# Altium PCB 2Motor16servoV3.PcbDoc (part 1 of 3)
Units mil, origin at the board's own origin, x right, y up, seen from the top; angles counter-clockwise.
Board outline 6000 x 4000 mil, 2 copper layers (Top Layer, Bottom Layer); 79 components, 93 nets, 290 pads, 78 vias.
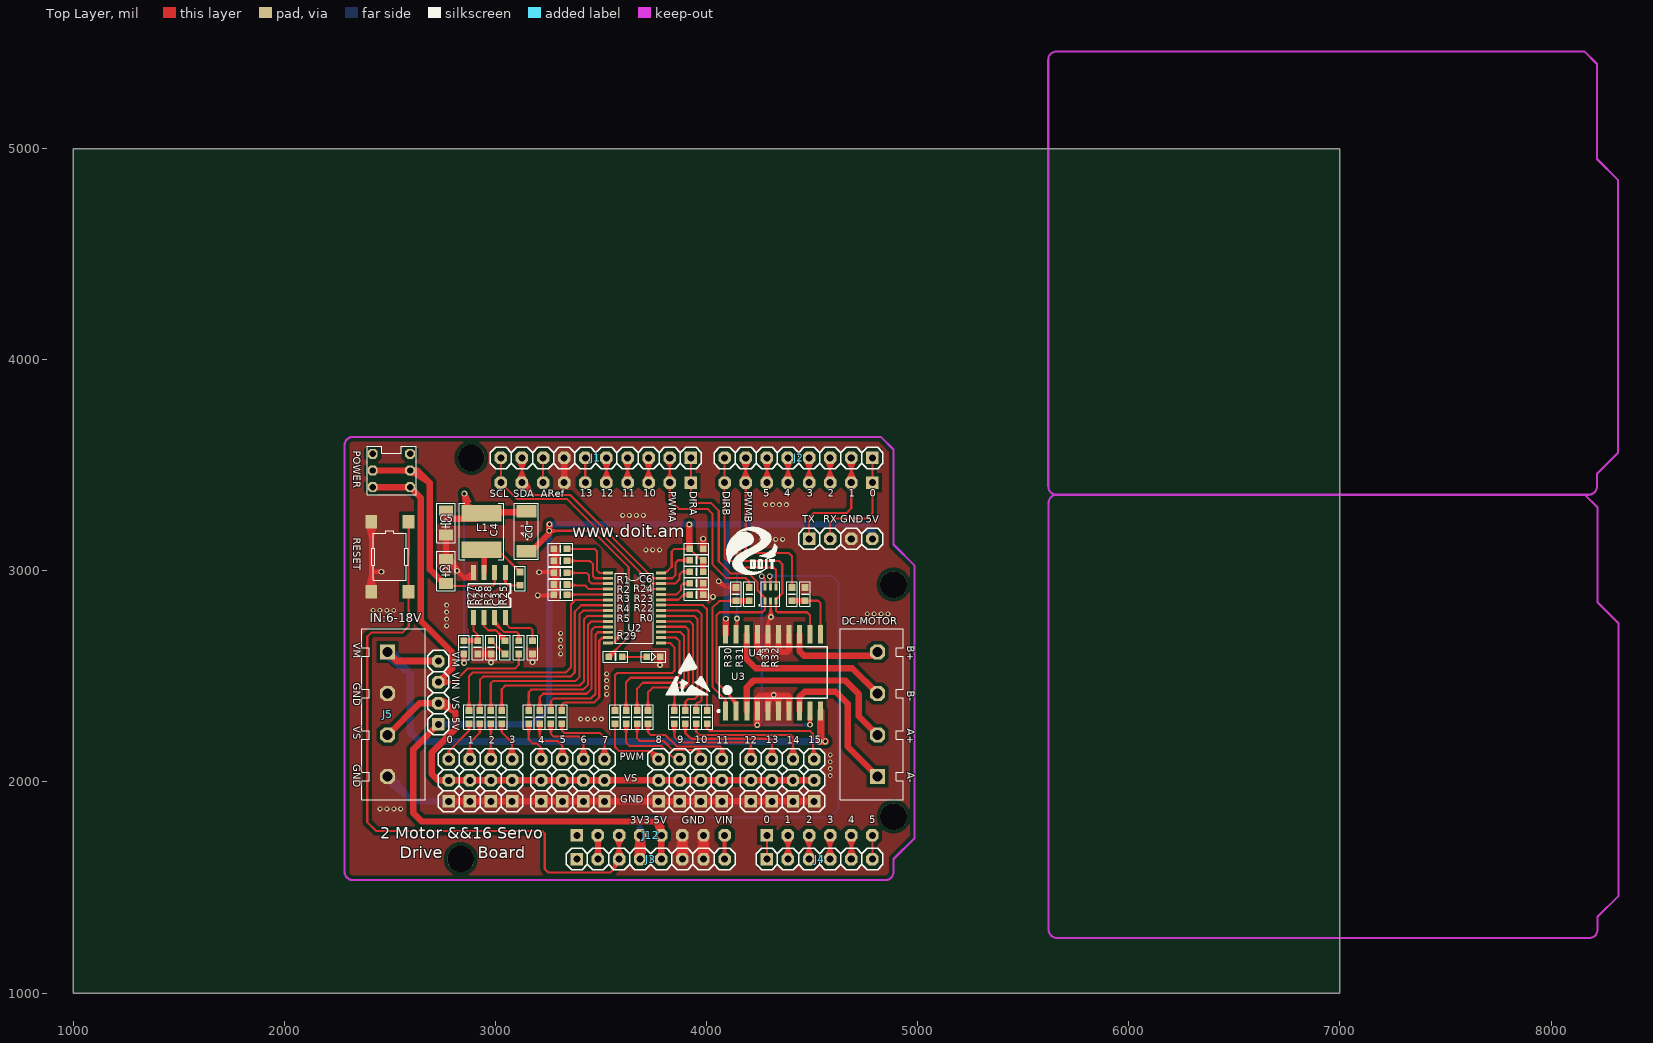
[diagram p0: Top Layer view]
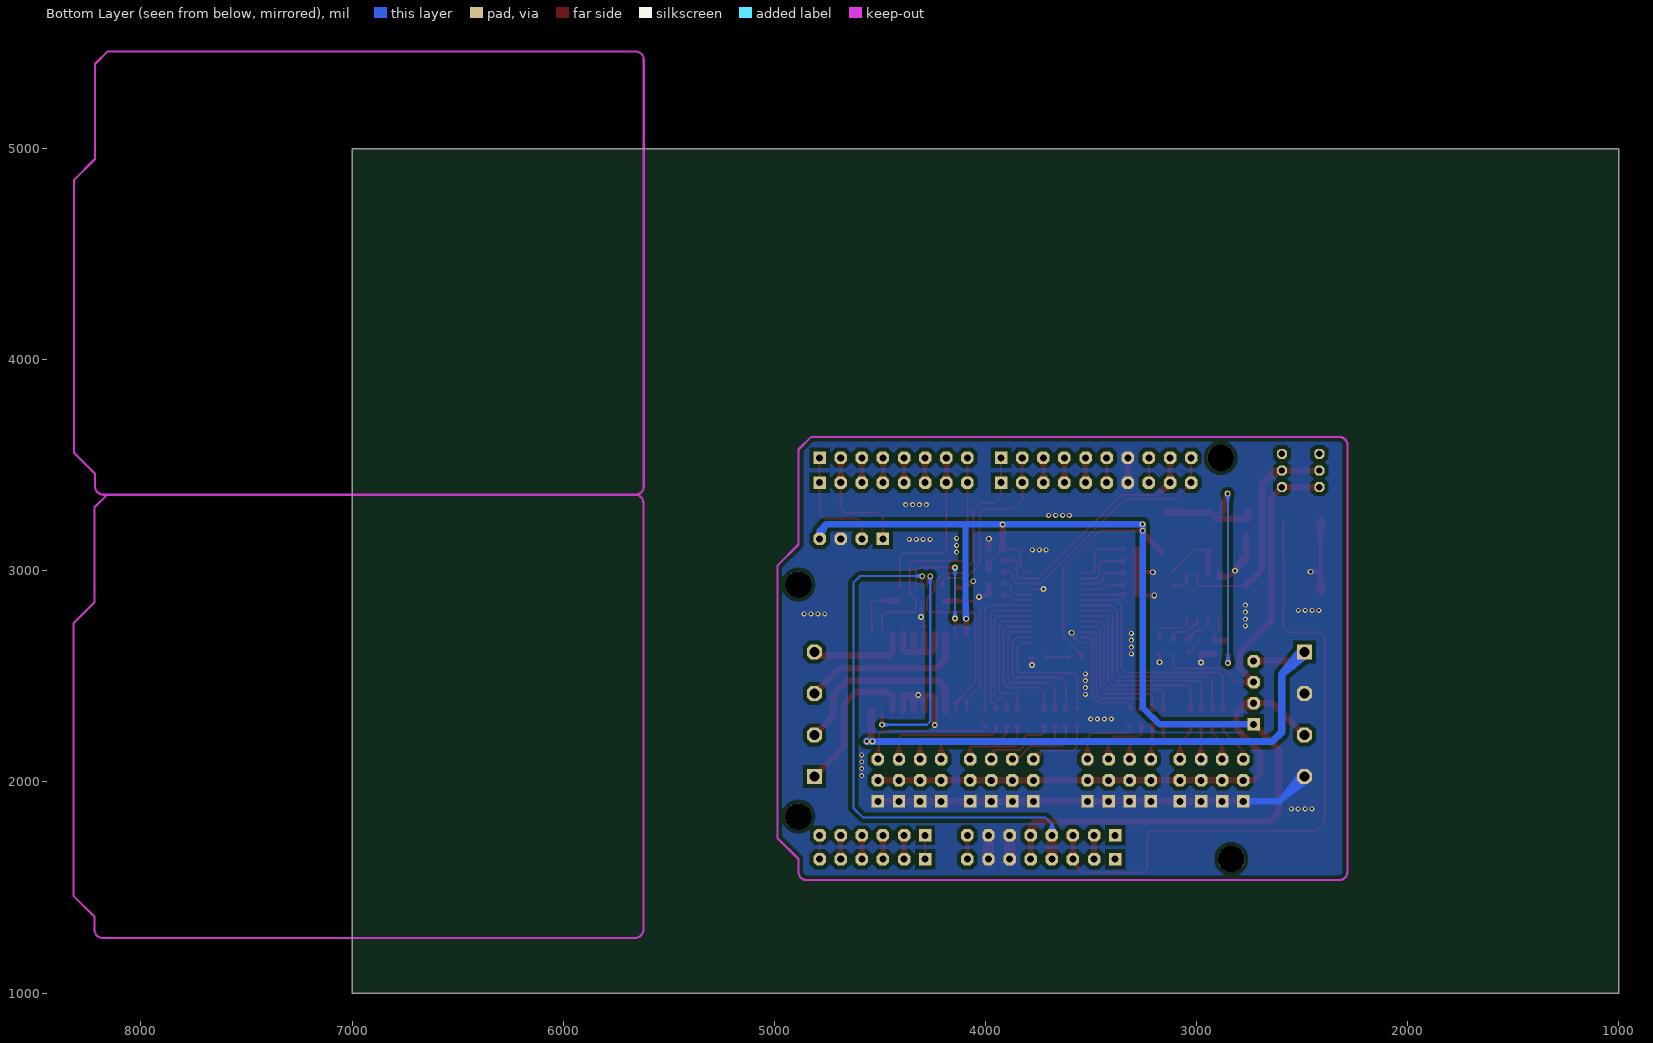
[diagram p1: Bottom Layer view, seen from below]

## Layer stack, top to bottom
Top Layer: signal copper 1.4
Dielectric: dielectric 12.6, FR-4, Dk 4.8
Bottom Layer: signal copper 1.4

## Board outline
1000,1000 7000,1000 7000,5000 1000,5000

## Design rules (kind name [scope] priority, off if disabled: settings)
Clearance Clearance_1 [InPoly] p1: gap=18
Clearance [All] p2: gap=8
ComponentClearance [All] p1 off: gap=10 collisioncheckmode=3 verticalgap=10 showdistances=FALSE
HoleSize [All] p1: absolutevalues=TRUE maxlimit=500 minlimit=1 maxpercent=80.000 minpercent=20.000
MinimumSolderMaskSliver [All] p1 off: minsoldermaskwidth=10
PolygonConnect PolygonConnect_1 [IsPoly] p1: connectstyle=Direct reliefconductorwidth=10 reliefentries=4 polygonreliefangle="90 Angle"
PolygonConnect [All] p2: connectstyle=Relief reliefconductorwidth=10 reliefentries=4 polygonreliefangle="90 Angle"
RoutingVias [All] p1: holewidth=28 width=50 viastyle="Through Hole" minholewidth=28 minwidth=50 maxholewidth=28 maxwidth=50
SilkToSilkClearance [All] p1 off: silktosilkclearance=10
SilkscreenOverComponentPads [All] p1 off: minsilkscreentomaskgap=10
SolderMaskExpansion [All] p1: expansion=4
Width [All] p1: maxlimit=40 minlimit=10 preferedwidth=10
23 further rules are at their usual default settings.

## Classes and differential pairs
component class Motor: 0 1 2 3 C1 C3 C4 C5 C6 D2 J1 J2 J3 J4 L1 POWER R1 R2 R3 R4 R5 R22 R23 R24 R25 R29 R30 R31 R32 R33 U2 U3 U4

## Components (designator, comment, footprint, x,y, rotation, side; value= is the part's Value field where it differs from the comment)
0 "SIP-1X03" DIP-1X03-2.54-MTA 2780,1908 r90 top (schematic designator PWM0)
1 "SIP-1X03" DIP-1X03-2.54-MTA 2880,1908 r90 top (schematic designator PWM1)
2 "SIP-1X03" DIP-1X03-2.54-MTA 2980,1908 r90 top (schematic designator PWM2)
3 "SIP-1X03" DIP-1X03-2.54-MTA 3080,1908 r90 top (schematic designator PWM3)
4 "SIP-1X03" DIP-1X03-2.54-MTA 3218,1908 r90 top (schematic designator PWM4)
5 "SIP-1X03" DIP-1X03-2.54-MTA 3318,1908 r90 top (schematic designator PWM5)
6 "SIP-1X03" DIP-1X03-2.54-MTA 3418,1908 r90 top (schematic designator PWM6)
7 "SIP-1X03" DIP-1X03-2.54-MTA 3518,1908 r90 top (schematic designator PWM7)
8 "SIP-1X03" DIP-1X03-2.54-MTA 3774,1908 r90 top (schematic designator PWM8)
9 "SIP-1X03" DIP-1X03-2.54-MTA 3874,1908 r90 top (schematic designator PWM9)
10 "SIP-1X03" DIP-1X03-2.54-MTA 3974,1908 r90 top (schematic designator PWM10)
11 "SIP-1X03" DIP-1X03-2.54-MTA 4074,1908 r90 top (schematic designator PWM11)
12 "SIP-1X03" DIP-1X03-2.54-MTA 4211,1908 r90 top (schematic designator PWM12)
13 "SIP-1X03" DIP-1X03-2.54-MTA 4311,1908 r90 top (schematic designator PWM13)
14 "SIP-1X03" DIP-1X03-2.54-MTA 4411,1908 r90 top (schematic designator PWM14)
15 "SIP-1X03" DIP-1X03-2.54-MTA 4511,1908 r90 top (schematic designator PWM15)
C1 "22UF" 1206C 2764,3004 r90 top
C2 "100nF" 0603C 3175,2644 r270 top
C3 "3.3nF" 0603C 3045.16,2644 r270 top
C4 "10nF" 0603C 3115.95,2969 r270 top
C5 "22UF" 1206C 2764,3232.55 r90 top
C6 "100nF" 0603C 3958,3104.18 r180 top
D2 "SS24" SMB 3146,3281.5 r270 top
J1 "DIP-1X10" DIP-1X10-2.54 3475,3535 r180 top locked (schematic designator IOH)
J2 "DIP-1X08" DIP-1X08-2.54 4435,3535 r180 top locked (schematic designator IOL)
J3 "DIP-1X08" DIP-1X08-2.54 3735,1635 r0 top locked (schematic designator POWER)
J4 "DIP-1X06" DIP-1X06-2.54 4535,1635 r0 top locked (schematic designator AD)
J5 "DIP-1X04" DIP-1X04-5.00-MTA 2489,2616 r270 top
J6 "DIP-1X04" DIP-1X04-2.54 2729,2523 r90 top
J7 "DIP-1X04" DIP-1X04-5.00-MTA 4810,2025.45 r90 top
J8 "DIP-1X04" DIP-1X04-2.54 4735,3152 r0 top
J10 "DIP-1X10" "DIP-1X10-2.54 - duplicate" 3475,3418 r180 top
J11 "DIP-1X08" "DIP-1X08-2.54 - duplicate" 4435,3418 r180 top
J12 "DIP-1X08" "DIP-1X08-2.54 - duplicate" 3735,1747 r0 top
J13 "DIP-1X06" "DIP-1X06-2.54 - duplicate" 4535,1747 r0 top
L1 "L" L5*5 2948,3187 r270 top
POWER "SW" BT-2 2418,3397 r0 top
R0 "10K" 0603R 3946,2888 r0 top (schematic designator R22)
R1 "10K" 0603R 3313,3103.59 r180 top
R2 "10K" 0603R 3313,3047.19 r180 top
R3 "10K" 0603R 3313,2990.79 r180 top
R4 "10K" 0603R 3313,2934.4 r180 top
R5 "10K" 0603R 3313,2886 r180 top
R6 "220R" 0603R 2875,2313 r270 top
R7 "220R" 0603R 2926.67,2313 r270 top
R8 "220R" 0603R 2978.33,2313 r270 top
R9 "220R" 0603R 3030,2313 r270 top
R10 "220R" 0603R 3158,2313 r270 top
R11 "220R" 0603R 3210.33,2313 r270 top
R12 "220R" 0603R 3262.67,2313 r270 top
R13 "220R" 0603R 3315,2313 r270 top
R14 "220R" 0603R 3567,2313 r270 top
R15 "220R" 0603R 3619.67,2313 r270 top
R16 "220R" 0603R 3671.33,2313 r270 top
R17 "220R" 0603R 3723,2313 r270 top
R18 "220R" 0603R 3848,2313 r270 top
R19 "220R" 0603R 3899.67,2313 r270 top
R20 "220R" 0603R 3951.33,2313 r270 top
R21 "220R" 0603R 4003,2313 r270 top
R22 "10K" 0603R 3946,2942.4 r0 top
R23 "10K" 0603R 3946,2996.8 r0 top
R24 "10K" 0603R 3946,3051.19 r0 top
R25 "100K" 0603R 3110.67,2644 r270 top
R26 "10K 1%" 0603R 2913.92,2632 r90 top
R27 "44.2K-48K" 0603R 2849,2632 r90 top
R28 "2.2K" 0603R 2978.84,2632 r90 top
R29 "2K" 0603R 3574,2592 r180 top
R30 "100K" 0603R 4138,2884 r90 top
R31 "1K" 0603R 4202,2896 r270 top
R32 "100K" 0603R 4467,2896 r270 top
R33 "1K" 0603R 4403,2884 r90 top
RED "YELLOW" 0603LED 3742,2593.41 r0 top
RESET "KEY_USER" TS42-5PIN 2499,3067 r270 top (schematic designator S1)
U1 "MP1482" SOP8-MP1482 3046,2993 r270 top
U2 "PCA9685" TSOP28 3532,2658 r0 top
U3 "L293D" SO20-L293D 4315,2518 r90 top
U4 "74LVC2G04" SOP6 4302,2890.98 r90 top
? "Comment" ESD 3924,2492 r0 top
? "Comment" LOGO-6*6 4216,3096 r0 top

## Footprints (in the part's own frame and the unit in brackets; to place one, negate y for a bottom-side part, rotate by r counter-clockwise, add the part's x,y. Pads: shape width x height; smd on the part's side, far side on the other; paste and mask are expansions set on the pad)
0603C [mm]
  rect 0.8x0.8 smd: 1(-0.65,-0.01) 2(0.95,-0.01)
  silkscreen extent -1.32,-0.66 1.63,0.64
0603LED [mm]
  rect 0.8x0.8 smd: 1(-0.65,-0.01) 2(0.95,-0.01)
  silkscreen extent -1.32,-0.66 1.63,0.64
0603R [mm]
  rect 0.8x0.8 smd: 1(-0.65,-0.025) 2(0.95,-0.025)
  silkscreen extent -1.32,-0.68 1.63,0.62
1206C [mm]
  rect 1.3x1.7 smd: 1(-1.6,-0.025) 2(1.299,-0.025)
  silkscreen extent -2.51,-1.12 2.24,1.09
BT-2 [mm]
  oct 1.2x1.2 hole 0.762: 1(0,0) 1(4.5,0) 2(0,2) 2(4.5,2) 3(0,4) 3(4.5,4)
  silkscreen extent -0.65,-0.9 5.25,4.9
DIP-1X03-2.54-MTA [mm]
  rect 1.5x1.5 hole 0.85: 1(0,0.051)
  oct 1.5x1.5 hole 0.85: 2(2.54,0.051) 3(5.08,0.051)
  silkscreen extent -1.27,-1.22 6.35,1.32
DIP-1X04-2.54 [mm]
  rect 1.5x1.5 hole 0.85: 1(-6.35,0)
  oct 1.5x1.5 hole 0.85: 2(-3.81,0) 3(-1.27,0) 4(1.27,0)
  silkscreen extent -7.62,-1.27 2.54,1.27
DIP-1X04-5.00-MTA [mm]
  rect 1.8x1.8 hole 1.2: 1(0,0)
  oct 1.8x1.8 hole 1.2: 2(5,0) 3(10,0) 4(15,0)
  silkscreen extent -2.79,-3.1 17.79,4.5
DIP-1X06-2.54 [mm]
  rect 1.5x1.5 hole 0.85: 1(-6.35,0)
  oct 1.5x1.5 hole 0.85: 2(-3.81,0) 3(-1.27,0) 4(1.27,0) 5(3.81,0) 6(6.35,0)
  silkscreen extent -7.62,-1.27 7.62,1.27
"DIP-1X06-2.54 - duplicate" [mm]
  rect 1.5x1.5 hole 0.85: 1(-6.35,0)
  oct 1.5x1.5 hole 0.85: 2(-3.81,0) 3(-1.27,0) 4(1.27,0) 5(3.81,0) 6(6.35,0)
DIP-1X08-2.54 [mm]
  rect 1.5x1.5 hole 0.85: 1(-8.89,0)
  oct 1.5x1.5 hole 0.85: 2(-6.35,0) 3(-3.81,0) 4(-1.27,0) 5(1.27,0) 6(3.81,0) 7(6.35,0) 8(8.89,0)
  silkscreen extent -10.16,-1.27 10.16,1.27
"DIP-1X08-2.54 - duplicate" [mm]
  rect 1.5x1.5 hole 0.85: 1(-8.89,0)
  oct 1.5x1.5 hole 0.85: 2(-6.35,0) 3(-3.81,0) 4(-1.27,0) 5(1.27,0) 6(3.81,0) 7(6.35,0) 8(8.89,0)
DIP-1X10-2.54 [mm]
  rect 1.5x1.5 hole 0.85: 1(-11.43,0)
  oct 1.5x1.5 hole 0.85: 2(-8.89,0) 3(-6.35,0) 4(-3.81,0) 5(-1.27,0) 6(1.27,0) 7(3.81,0) 8(6.35,0) 9(8.89,0) 10(11.43,0)
  silkscreen extent -12.7,-1.27 12.7,1.27
"DIP-1X10-2.54 - duplicate" [mm]
  rect 1.5x1.5 hole 0.85: 1(-11.43,0)
  oct 1.5x1.5 hole 0.85: 2(-8.89,0) 3(-6.35,0) 4(-3.81,0) 5(-1.27,0) 6(1.27,0) 7(3.81,0) 8(6.35,0) 9(8.89,0) 10(11.43,0)
ESD [mil]
  silkscreen extent -118,-78 96,119
L5*5 [mm]
  rect 2x4.8 smd: 1(-2.2,-0.356) 2(2.2,-0.356)
  silkscreen extent -3.4,-3.02 3.4,2.29
LOGO-6*6 [mil]
  silkscreen extent -123,-113 118,112
SMB [mm]
  rect 1.5x2.4 smd: 1(-0.041,0) 2(4.76,0)
  silkscreen extent -1.02,-1.45 5.77,1.42
SO20-L293D [mm] "SOIC, 20-Leads, Body 12.82x7.52mm, Pitch 1.27mm, Thermal Pad 9.00.2x6.00.2mm, IPC Medium Density"
  rect 2.25x0.6 smd: 1(-4.625,5.715) 2(-4.625,4.445) 3(-4.625,3.175) 4(-4.625,1.905) 5(-4.625,0.635) 6(-4.625,-0.635) 7(-4.625,-1.905) 8(-4.625,-3.175) 9(-4.625,-4.445) 10(-4.625,-5.715) 11(4.625,-5.715) 12(4.625,-4.445) 13(4.625,-3.175) 14(4.625,-1.905) 15(4.625,-0.635) 16(4.625,0.635) 17(4.625,1.905) 18(4.625,3.175) 19(4.625,4.445) 20(4.625,5.715)
  silkscreen extent -4.75,-6.5 3.1,6.69, body extent -3.8,-6.5 3.8,6.5, height 2.65
SOP6 [mm] "TSOP, 6-Leads, Body 2.00x1.25mm, Pitch 0.65mm, IPC Medium Density"
  rect 0.85x0.35 smd: 1(-0.85,0.65) 2(-0.85,0) 3(-0.85,-0.65) 4(0.85,-0.65) 5(0.85,0) 6(0.85,0.65)
  silkscreen extent -1.5,-1.1 1.47,1.43, body extent -0.7,-1.1 0.7,1.1, height 1.1
SOP8-MP1482 [mm]
  rect 1.8x0.6 smd: 1(0,0) 2(0,-1.27) 3(0,-2.54) 4(0,-3.81) 5(5.45,-3.81) 6(5.45,-2.54) 7(5.45,-1.27) 8(5.45,0)
  silkscreen extent 1.36,-4.44 4.19,0.64
TS42-5PIN [mm]
  rect 1.6x1.4 smd: 1(-4.2,2.25) 1(4.2,2.25) 2(-4.2,-2.25) 2(4.2,-2.25)
  silkscreen extent -3.1,-2.2 2.85,2.2
TSOP28 [mm]
  rect 1.2x0.35 smd: 1(0,8.45) 2(0,7.8) 3(0,7.15) 4(0,6.5) 5(0,5.85) 6(0,5.2) 7(0,4.55) 8(0,3.9) 9(0,3.25) 10(0,2.6) 11(0,1.95) 12(0,1.3) 13(0,0.65) 14(0,0) 15(6.375,0.025) 16(6.375,0.673) 17(6.375,1.321) 18(6.375,1.969) 19(6.375,2.617) 20(6.375,3.265) 21(6.375,3.913) 22(6.375,4.561) 23(6.375,5.21) 24(6.375,5.858) 25(6.375,6.506) 26(6.375,7.154) 27(6.375,7.802) 28(6.375,8.45)
  silkscreen extent 0.91,-0.03 5.49,8.42

## Part data
0 1 2 3 4 5 6 7 8 9 10 11 12 13 14 15: "Header, 3-Pin"
C1 C2 C3 C4 C5 C6: library part CAP, "Capacitor"
D2: library part DIODE
J1 J10: "Header, 10-Pin"
J2 J3 J11 J12: "Header, 8-Pin"
J4 J13: "Header, 6-Pin"
J5 J6 J7 J8: "Header, 4-Pin"
L1: "Inductor"
R0 R1 R2 R3 R4 R5 R6 R7 R8 R9 R10 R11 R12 R13 R14 R15 R16 R17 R18 R19 R20 R21 R22 R23 R24 R25 R26 R27 R28: library part Res2, "Resistor"
R29: library part SMT_R_0402, "Surface mount resistor 0402"
R30 R31 R32 R33: library part Res, "Resistor"
RED: library part LED
RESET: library part SMT_SW_PTS_820, "SMT Tactile ?Switch PTS 820 Series"

## Free pads (board coordinates)
  round 125.98 hole 125.98 unplated: ""(2835,1635) ""(2885,3535) ""(4885,1836) ""(4885,2935)

## Via types
v1: diameter 23.62, hole 11.81, Top Layer to Bottom Layer, tented both sides, 50 vias
v2: diameter 27.56, hole 15.75, Top Layer to Bottom Layer, tented both sides, 28 vias

## Nets (pads, with @x,y where several pads share a name; then routed paths per layer and width w, separated by ;. In a path a pad name is that pad's centre, name@x,y a point inside that pad or via, vN(x,y) a via of type N, cw(c..) or ccw(c..) an arc to the next point about the centre after c; other vN are vias at no path point)
ADC_EX: J4.1 J13.1 | length 112
  Top Layer w10: J4.1@4285,1635 J13.1@4285,1747
BS: C4.2 U1.1 | length 317.2
  Top Layer w10: U1.1@3039.25,2968.5 3046,2943 ; 3042.96,2954.46 cw(c3049.57,2956.21) U1.1@3047.78,2962.8 ; U1.1@3044.22,2962.8 cw(c3042.43,2956.21) 3049.04,2954.46 ; U1.1@3046,2969.38 3046,2943 ; U1.1@3046,2993 3046,2943 ; U1.1@3052.75,2968.5 3046,2943 ; C4.2@3107.94,2924 ccw(c3089.6,2905.65) 3089.6,2931.6 ccw(c3089.6,2957.55) C4.2@3107.94,2939.2 ; C4.2@3115.54,2931.6 3057.4,2931.6 3046,2943 ; 3046,2952.93 cw(c3062.44,2952.93) 3050.82,2964.56 ccw(c3062.44,2952.93) 3046,2952.93 ; 3046,2952.93 ccw(c3029.56,2952.93) 3041.18,2964.56 cw(c3029.56,2952.93) 3046,2952.93
EN: J1.8 J10.8 | length 117
  Top Layer w10: J10.8@3225,3418 J1.8@3225,3535
GND: 0.1 1.1 2.1 3.1 4.1 5.1 6.1 7.1 8.1 9.1 10.1 11.1 12.1 13.1 14.1 15.1 C1.2 C2.2 C5.1 C6.1 J1.7 J3.6 J3.7 J5.2 J5.4 J8.3 J10.7 J12.6 J12.7 R0.2 R1.2 R2.2 R3.2 R4.2 R5.2 R22.2 R26.1 R28.1 R30.2 R32.1 RED.2 RESET.2 U1.4 U2.14 U2.25 U3.4 U3.5 U3.6 U3.7 U3.14 U3.15 U3.16 U3.17 U4.2 | length 22355.1
  Top Layer w10: R5.2@3275.6,2879 R5.2@3287.41,2890.81 ; R1.2@3275.6,3104.59 R1.2@3287.41,3104.59 ; U2.14@3532,2658 3560,2658 ; U2.14@3548.73,2659.89 ccw(c3548.73,2691.65) 3571.19,2669.19 ; 3563.28,2661.28 ccw(c3517.57,2707) v2@3582.22,2707 ; 3568.2,2670.3 cw(c3616.12,2652.69) v2@3594.69,2699.03 ; 3570.29,2669.08 ccw(c3531.36,2702.12) v2@3582.25,2706.28 ; 3576.52,2692.96 cw(c3601.79,2683.68) v2@3590.49,2708.11 ; 3580.36,2678.36 ccw(c3551.71,2707) v2@3592.22,2707 ; v2@3582.51,2704.77 cw(c3562.01,2699.37) 3580.32,2688.69 cw(c3598.63,2678.01) v2@3593.23,2698.51 ; v2@3583.06,2710.74 3565.81,2663.81 ; 3585.91,2687.49 ccw(c3565.39,2704.91) v2@3592.22,2707.1 ; v2@3598.17,2701.93 3565.81,2663.81 ; v2(3724,2914) 3724.13,2914.13 U2.25@3783,2914.13 ; v2@3729.38,2914.13 U2.25@3766.27,2914.13 ; RED.2@3768.78,2591.37 v2@3779.4,2557.6 ; v2@3771.22,2558.06 ccw(c3747.99,2570.17) RED.2@3772.98,2578.03 ; RED.2@3771.8,2585.4 cw(c3753.45,2567.05) 3779.4,2567.05 cw(c3805.35,2567.05) RED.2@3787,2585.4 ; v2@3772.79,2560.21 ccw(c3756.83,2576.17) 3779.4,2576.17 ; v2@3773.45,2560.8 ccw(c3765.53,2570.49) 3777.61,2573.73 ; v2@3774.61,2561.6 ccw(c3769.12,2571.12) 3779.73,2568.27 ; v2@3774.94,2561.78 ccw(c3766.24,2578.47) 3784.19,2572.82 ; 3775.1,2571.29 ccw(c3790.55,2576.15) v2@3783.06,2561.78 ; 3779.4,2574.23 ccw(c3799.23,2574.23) v2@3785.21,2560.21 ; RED.2@3779.4,2593 v2@3779.4,2557.6 ; 3781.54,2575.02 ccw(c3796.77,2570.94) v2@3785.36,2560.06 ; 3785.2,2576.03 ccw(c3807.69,2568.96) v2@3786.78,2558.06 ; RED.2@3790.03,2591.37 v2@3779.4,2557.6 ; R0.2@3972.68,2886.19 R22.2@3974.59,2932.38 ; R0.2@3972.73,2888.26 3983.4,2932.75 R0.2@3994.08,2888.26 ; R22.2@3972.73,2940.14 3983.4,2895.65 R22.2@3994.08,2940.14 ; R0.2@3973.07,2895.48 cw(c4027.76,2893.22) R22.2@3990.68,2933.49 ; R0.2@3973.16,2890.26 R22.2@3992.21,2932.38 ; 3973.87,2915 ccw(c4012.09,2913.42) 3983.95,2887.51 ccw(c4007.54,2908.73) 4007.54,2877 ; 3974.06,2919.6 cw(c4004.64,2918.34) R22.2@3983.91,2940.85 ; R0.2@3974.24,2892.62 ccw(c3946.24,2909.78) 3978.17,2917.44 ; R22.2@3974.24,2935.78 cw(c3946.24,2918.62) 3978.17,2910.96 ; R22.2@3974.47,2935.42 cw(c3943.77,2914.89) R0.2@3977.42,2899.67 ; R0.2@3974.49,2893.01 ccw(c3952.98,2907.53) 3978.45,2912.47 ccw(c4003.93,2917.42) R0.2@3989.41,2895.91 ; R0.2@3974.9,2893.58 ccw(c3951.55,2911.66) 3978.46,2923.83 ; R0.2@3975.8,2894.6 ccw(c3957.45,2912.95) 3983.4,2912.95 ccw(c4009.35,2912.95) R0.2@3991,2894.6 ; R22.2@3975.8,2933.8 cw(c3957.45,2915.45) 3983.4,2915.45 cw(c4009.35,2915.45) R22.2@3991,2933.8 ; R0.2@3975.95,2901.69 ccw(c3987.47,2898.92) R0.2@3983.64,2887.71 ; R22.2@3975.95,2926.71 cw(c3987.47,2929.48) R22.2@3983.64,2940.69 ; 3976,2925.1 cw(c3990.12,2927.84) R22.2@3983.73,2940.73 ; R22.2@3976.12,2933.49 cw(c3939.04,2893.22) R0.2@3993.74,2895.48 ; R0.2@3977.39,2895.91 ccw(c3962.88,2917.42) 3988.35,2912.47 ccw(c4013.82,2907.53) R0.2@3992.31,2893.01 ; R0.2@3977.78,2896.16 ccw(c3967.82,2912.41) 3986.36,2907.97 ; R22.2@3977.78,2932.23 cw(c3967.82,2915.99) 3986.36,2920.43 ; 3978.5,2912.22 cw(c3996.16,2915.65) R22.2@3988.17,2931.77 ; 3978.51,2912.36 ccw(c3991.03,2909.36) R0.2@3986.87,2897.17 ; 3978.51,2916.03 cw(c3991.03,2919.04) R22.2@3986.87,2931.23 ; R22.2@3978.63,2931.77 cw(c3970.64,2915.65) 3988.3,2912.22 ; R0.2@3979.93,2897.17 ccw(c3975.77,2909.36) 3988.29,2912.36 ; R22.2@3979.93,2931.23 cw(c3975.77,2919.04) 3988.29,2916.03 ; 3980.45,2907.97 ccw(c3998.98,2912.41) R0.2@3989.02,2896.16 ; 3980.45,2920.43 cw(c3998.98,2915.99) R22.2@3989.02,2932.23 ; 3981.5,2908.69 ccw(c4000.38,2900.15) R0.2@3983.99,2887.46 ; 3981.97,2916.07 cw(c4005.41,2926.68) R22.2@3984.02,2940.98 ; R0.2@3982.35,2876.3 v2(4030,2877) ; R0.2@3982.81,2887.46 ccw(c3966.42,2900.15) 3985.31,2908.69 ; R22.2@3982.78,2940.98 cw(c3961.39,2926.68) 3984.84,2916.07 ; R0.2@3982.85,2887.51 ccw(c3954.71,2913.42) 3992.93,2915 ; R22.2@3982.89,2940.85 cw(c3962.17,2918.34) 3992.74,2919.6 ; R22.2@3983.07,2940.73 cw(c3976.68,2927.84) 3990.8,2925.1 ; R0.2@3983.16,2887.71 ccw(c3979.33,2898.92) R0.2@3990.85,2901.69 ; R22.2@3983.16,2940.69 cw(c3979.33,2929.48) R22.2@3990.85,2926.71 ; R22.2@3983.4,2941.4 R0.2@3983.4,2887 ; R0.2@3983.82,2886.38 cw(c3996.53,2867.83) 4006.05,2888.2 ; R0.2@3983.92,2887.54 ccw(c4010.58,2914.99) 4011.14,2876.72 ; R0.2@3986.83,2897.19 v2(4030,2877) ; R0.2@3987.4,2877 v2(4030,2877) ; 3988.35,2923.83 ccw(c4015.25,2911.66) R0.2@3991.9,2893.58 ; 3988.63,2910.96 cw(c4020.56,2918.62) R22.2@3992.57,2935.78 ; 3988.63,2917.44 ccw(c4020.56,2909.78) R0.2@3992.57,2892.62 ; R0.2@3989.24,2877.98 cw(c4003.33,2856.19) 4008.77,2881.56 cw(c4014.22,2906.93) R0.2@3992.43,2892.84 ; R0.2@3989.39,2899.67 cw(c4023.03,2914.89) R22.2@3992.34,2935.42 ; R0.2@3989.47,2878.13 cw(c4008.01,2851.05) v2@4021.92,2880.78 ; R0.2@3991.39,2894.19 ccw(c4030,2928.95) v2(4030,2877) ; R0.2@3993.64,2890.26 R22.2@3974.59,2932.38 ; R0.2@3994.12,2886.19 R22.2@3992.21,2932.38 ; 4004.04,2883.95 cw(c3998.96,2855.32) v2@4022.8,2871.97 ; 4015.02,2882 ccw(c4017.35,2895.11) v2@4024.97,2884.2 ; v2@4021.75,2874.01 ccw(c4001.82,2866.78) 4010.8,2885.98 ccw(c4019.78,2905.18) v2@4027.01,2885.25 ; v2@4022.4,2872.61 ccw(c4004.04,2862.01) 4009.53,2882.49 ccw(c4015.01,2902.96) v2@4025.61,2884.6 ; v2@4022.63,2872.23 ccw(c4004.83,2860.72) 4009.28,2881.45 ccw(c4013.72,2902.17) v2@4025.23,2884.37 ; v2@4023.7,2883.12 cw(c4008.5,2897.88) 4008.81,2876.69 cw(c4009.12,2855.5) v2@4023.88,2870.7 ; v2@4023.79,2870.79 ccw(c4008.8,2855.8) 4008.8,2877 ccw(c4008.8,2898.2) v2@4023.79,2883.21 ; v2@4051.86,2943.89 4091,2921 ; v2@4055.82,2950.69 ccw(c4081.83,2957.51) 4068.26,2934.3 ; v2@4055.85,2942.3 cw(c4049.16,2891.71) 4089.66,2922.75 ; v2@4057,2942.22 cw(c4057,2911.37) 4078.82,2933.18 ; v2@4057.16,2952.21 cw(c4053.63,2925.55) 4074.98,2941.91 ; v2@4057.55,2942.24 cw(c4058.87,2921.08) 4072.89,2936.98 cw(c4086.92,2952.87) v2@4065.76,2951.55 ; v2@4063.42,2956.99 4091,2921 ; v2@4065.49,2953.23 ccw(c4114.85,2966.16) 4089.1,2922.11 ; v2@4065.78,2951 ccw(c4077.32,2951) 4069.16,2942.84 ; 4091.4,2921.4 R30.2@4139,2921.4 ; 4113.64,2916.51 ccw(c4116.64,2929.03) R30.2@4128.83,2924.87 ; 4113.64,2926.29 cw(c4116.64,2913.77) R30.2@4128.83,2917.93 ; R30.2@4124.31,2913.95 ccw(c4127.08,2925.47) R30.2@4138.29,2921.64 ; R30.2@4124.31,2928.85 cw(c4127.08,2917.33) R30.2@4138.29,2921.16 ; R30.2@4131.4,2913.8 ccw(c4113.05,2895.45) 4113.05,2921.4 ccw(c4113.05,2947.35) R30.2@4131.4,2929 ; R30.2@4137.74,2910.73 4093.25,2921.4 R30.2@4137.74,2932.08 ; U3.16@4283.25,2733.44 4290,2759 ; 4286.96,2747.51 ccw(c4293.59,2745.76) U3.16@4291.79,2739.14 ; U3.16@4288.21,2739.14 ccw(c4286.41,2745.76) 4293.04,2747.51 ; 4288.43,2757.75 ccw(c4274.42,2775.37) v2@4296.42,2780.14 ; U3.16@4290,2700.09 4290,2759 ; U3.16@4290,2732.57 4290,2759 ; 4292.13,2767.1 cw(c4317.2,2760.52) v2@4304.4,2783.06 ; v2@4296.22,2782.28 4302,2825.9 ; v2@4296.41,2780.19 cw(c4275.67,2775.82) 4293.42,2764.25 cw(c4311.18,2752.67) v2@4306.81,2773.41 ; v2@4296.4,2780.25 cw(c4273.42,2775.58) 4290,2759 ; U3.16@4296.75,2733.44 4290,2759 ; v2@4296.97,2785.56 4290,2759 ; v2@4298.38,2787.77 ccw(c4282.41,2801.7) 4303.55,2803.15 ccw(c4324.7,2804.59) v2@4310.77,2788.62 ; v2@4298.79,2788.21 ccw(c4291.05,2795.95) 4302,2795.95 ; v2@4299.12,2788.52 ccw(c4283.67,2805.62) 4305.89,2811.72 ; 4301.02,2767.76 ccw(c4291.95,2779.17) v2@4306.19,2782.26 ; 4302,2810.44 ccw(c4333.44,2810.44) v2@4311.21,2788.21 ; 4302,2810.79 U4.2@4302,2847.68 ; U4.2@4302,2857.52 4302,2771 4290,2759 ; v2@4305.82,2781.09 ccw(c4295.85,2792.13) 4310.19,2796.07 ; v2@4311.49,2776.09 4290,2759 ; v2@4313.66,2783.47 4302,2825.9 ; 3560,2658 3548.73,2658 3560,2658 ; 3560,2658 3591,2689 ; 3565.81,2663.81 v2(3591,2707) ; v2@3585.6,2700.08 cw(c3576.94,2689) 3591,2689 ; v2@3585.6,2700.08 cw(c3576.94,2689) 3591,2689 ; v2@3585.6,2700.08 cw(c3576.94,2689) 3591,2689 ; 3591,2689 cw(c3605.06,2689) v2@3596.4,2700.08 ; 3591,2689 cw(c3605.06,2689) v2@3596.4,2700.08 ; 3591,2689 cw(c3605.06,2689) v2@3596.4,2700.08 ; 3591,2689 v2(3591,2707) ; 3591,2689 3582.49,2704.86 3591,2689 ; 3591,2689 3599.51,2704.86 3591,2689 ; 3591,2689 v2(3591,2707) ; 3591,2689 v2(3591,2707) ; R22.2@3974.59,2932.38 R0.2@3983.4,2887 ; R0.2@3983.4,2887 v2(4030,2877) ; R0.2@3983.4,2887 R22.2@3992.21,2932.38 ; 4091,2921 v2(4057,2951) 4061,2951 4091,2921 ; 4290,2749.01 cw(c4273.56,2749.01) 4285.18,2737.38 ccw(c4273.56,2749.01) 4290,2749.01 ; 4290,2749.01 ccw(c4306.44,2749.01) 4294.82,2737.38 cw(c4306.44,2749.01) 4290,2749.01 ; 4290,2759 v2(4305,2782) 4302,2825.9 ; v2@3730.21,2907.79 cw(c3745.51,2892.49) 3745.51,2914.13 ccw(c3745.51,2892.49) v2@3730.21,2907.79 ; v2@3730.21,2920.21 ccw(c3744.88,2934.88) 3744.88,2914.13 cw(c3744.88,2934.88) v2@3730.21,2920.21
  Top Layer w20: RESET.2@2392.97,2907.55 2411.42,2993 ; RESET.2@2392.97,3226.46 2411.42,3140.85 ; RESET.2@2398,2918 ccw(c2365.61,2950.39) 2411.42,2950.39 ; RESET.2@2398,3216 cw(c2365.61,3183.61) 2411.42,3183.61 ; RESET.2@2398.15,2918.14 ccw(c2368.52,2948.46) 2410.9,2947.98 ccw(c2453.29,2947.49) RESET.2@2422.98,2917.86 ; RESET.2@2398.15,3215.86 cw(c2368.52,3185.54) 2410.9,3186.03 cw(c2453.29,3186.51) RESET.2@2422.98,3216.14 ; 2403.28,2955.29 ccw(c2434.16,2948.63) RESET.2@2418.9,2920.96 ; 2403.28,3178.63 cw(c2434.27,3185.31) RESET.2@2418.92,3213.05 ; RESET.2@2404.12,2921.98 ccw(c2395.17,2945.28) 2419.68,2949.98 ; RESET.2@2404.1,3212.03 cw(c2395.09,3188.67) 2419.68,3183.95 ; RESET.2@2410.42,2905.59 2411.42,2993 ; RESET.2@2410.42,3228.42 2411.42,3140.85 ; RESET.2@2411.42,2894 2411.42,2993 ; 2411.42,2945.56 ccw(c2450.4,2945.56) RESET.2@2422.84,2918 ; 2411.42,3188.44 cw(c2450.4,3188.44) RESET.2@2422.84,3216 ; RESET.2@2411.42,3251.35 2411.42,2993 ; RESET.2@2427.91,2907.15 2411.42,2993 ; RESET.2@2427.91,3226.86 2411.42,3140.85 ; v2(2459,2996) 2414.42,2996 2411.42,2993 ; C1.2@2762.02,3043.96 2832.28,2986.72 ; C1.2@2765,3043.15 2775.85,3043.15 2852,2967 ; C1.2@2768.49,3054.71 ccw(c2810.65,3059.01) 2783.88,3026.15 ; C1.2@2769.13,3040.02 cw(c2747.33,2952.01) v2@2824.98,2998.83 ; C1.2@2771.78,3039.6 cw(c2769.12,3002.06) 2797.55,3026.73 cw(c2825.97,3051.4) C1.2@2788.43,3054.06 ; C1.2@2772.87,3055.15 2832.28,2986.72 ; C1.2@2773.93,3059.43 cw(c2763.74,3018.29) 2800.04,3040.18 ; C1.2@2785.48,3064.32 2832.28,2986.72 ; C1.2@2788.38,3056.74 ccw(c2878.59,3065.95) v2@2821.32,2995.65 ; C1.2@2788.46,3055.15 ccw(c2847.9,3055.15) 2805.87,3013.13 ; 2806.28,3016.83 cw(c2790.55,3000.5) v2@2813.22,3000.93 ; 2809.22,3013.29 cw(c2796.71,3002.43) v2@2813.23,3001.27 ; 2810.06,3023.57 cw(c2785.55,3008.79) v2@2813.33,3001.91 ; v2@2816.09,2997.33 cw(c2809.21,2969.55) 2833.72,2984.33 ; v2@2816.73,2997.23 cw(c2815.57,2980.71) 2828.07,2991.57 ; 2861.64,2972.7 cw(c2875.29,2949.61) U1.4@2894.69,2968.13 ; 2978,2588.1 cw(c2998.15,2588.1) R28.1@2983.9,2602.34 ; R28.1@2978,2604.57 v2(2978,2566) R28.1@2979.84,2606.41 ; v2@3174.59,2565.59 C2.2@3174.59,2606.6 ; 3254.48,2884 ccw(c3254.48,2908.12) 3271.53,2891.06 ccw(c3233.2,2929.39) R4.2@3287.41,2929.39 ; 3255.93,2994.19 cw(c3255.93,2972.13) 3271.53,2987.73 cw(c3233.2,2949.4) R4.2@3287.41,2949.4 ; R3.2@3270.98,2988.37 cw(c3217.9,2948.94) R4.2@3283.32,2939.28 ; R3.2@3271.47,2987.8 cw(c3249.81,2966.82) 3279.63,2962.37 ; R3.2@3271.47,2995.79 ccw(c3249.82,3016.77) 3279.63,3021.23 ; R2.2@3271.47,3044.19 cw(c3249.87,3023.22) 3279.64,3018.75 ; R2.2@3271.47,3052.19 ccw(c3249.78,3073.17) 3279.62,3077.62 ; R4.2@3271.48,2939.4 ccw(c3249.89,2960.37) 3279.65,2964.84 ; R4.2@3271.53,2931.33 cw(c3233.2,2893) R5.2@3287.41,2893 ; R4.2@3271.53,2939.46 ccw(c3233.2,2977.79) R3.2@3287.41,2977.79 ; R3.2@3271.53,2995.86 ccw(c3233.2,3034.19) R2.2@3287.41,3034.19 ; R2.2@3271.53,3044.13 cw(c3233.2,3005.8) R3.2@3287.41,3005.8 ; R2.2@3271.53,3052.26 ccw(c3233.2,3090.59) R1.2@3287.41,3090.59 ; R1.2@3271.53,3100.53 cw(c3233.2,3062.2) R2.2@3287.41,3062.2 ; R4.2@3271.67,2931.2 cw(c3255.27,2913.67) 3279.02,2910.17 ; R1.2@3271.92,3100.18 cw(c3254.7,3079.53) 3281.01,3074.02 ; R4.2@3272.17,2940.01 ccw(c3249.51,2970.52) 3287.11,2964.97 ; R3.2@3272.18,2987.17 cw(c3246.99,2953.13) 3288.88,2959.39 ; R3.2@3272.18,2996.42 ccw(c3247,3030.45) 3288.87,3024.19 ; R2.2@3272.18,3043.57 cw(c3247.01,3009.58) 3288.84,3015.82 ; R5.2@3272.47,2891.82 ccw(c3261.26,2909.1) 3281.17,2914.37 ; R5.2@3273.6,2884 v2(3200,2884) R5.2@3275.6,2887 ; R3.2@3283.6,2994.19 3205.19,2994.19 R3.2@3275.6,2991.79 ; 3287.41,2967.01 R5.2@3275.6,2887 ; 3287.41,3014.44 R4.2@3275.6,2935.4 ; 3287.41,3070.54 R3.2@3275.6,2991.79 ; J3.6@3865.5,1633.88 J12.6@3870.09,1724.61 ; J3.6@3865.59,1637.13 3885,1724.53 J3.6@3904.41,1637.13 ; J12.6@3865.59,1744.87 3885,1657.47 J12.6@3904.41,1744.87 ; J3.6@3866.19,1640.26 J12.6@3899.91,1724.61 ; 3867.2,1667.43 cw(c3961.21,1662.68) J12.6@3898.09,1732.51 ; 3867.92,1681.65 ccw(c3932.98,1678.36) 3884.65,1634.68 cw(c3915.62,1658.56) 3879.31,1673.07 ; J12.6@3868.38,1736.75 cw(c3797.24,1692.9) J3.6@3874.84,1661.88 ; J3.6@3868.53,1645.49 ccw(c3814.72,1679.73) 3876.98,1693.56 ; J12.6@3868.53,1736.51 cw(c3814.72,1702.27) 3876.98,1688.44 ; J3.6@3869.11,1646.35 ccw(c3830.76,1673.77) 3877.26,1681.5 ccw(c3923.77,1689.24) J3.6@3896.35,1650.89 ; J3.6@3869.52,1646.91 ccw(c3822.04,1683.43) 3877.66,1705.66 ; 3869.64,1715.65 cw(c3915.42,1713.34) J12.6@3884.68,1747.35 ; J12.6@3870.35,1729.87 ccw(c3983.64,1724.15) J3.6@3899.49,1648.09 ; J3.6@3870.51,1648.09 ccw(c3786.36,1724.15) J12.6@3899.65,1729.87 ; J3.6@3870.89,1660.98 ccw(c3893.41,1655.98) J3.6@3884.82,1634.56 ; J12.6@3870.89,1721.02 cw(c3893.41,1726.02) J12.6@3884.82,1747.44 ; J3.6@3871.19,1648.81 ccw(c3837.86,1682.14) 3885,1682.14 ccw(c3932.14,1682.14) J3.6@3898.81,1648.81 ; J12.6@3871.19,1733.19 cw(c3837.86,1699.86) 3885,1699.86 cw(c3932.14,1699.86) J12.6@3898.81,1733.19 ; J12.6@3871.27,1717.53 cw(c3900.38,1722.37) J12.6@3884.75,1747.4 ; J12.6@3871.91,1732.51 cw(c3808.79,1662.68) 3902.8,1667.43 ; J3.6@3873.65,1650.89 ccw(c3846.23,1689.24) 3892.74,1681.5 ccw(c3939.24,1673.77) J3.6@3900.89,1646.35 ; J3.6@3874.51,1651.47 ccw(c3858.13,1677.21) 3887.91,1670.6 ; J12.6@3874.51,1730.53 cw(c3858.13,1704.79) 3887.91,1711.4 ; J12.6@3874.66,1730.44 cw(c3852.46,1694.87) 3893.82,1687.98 ; 3875.99,1683.97 ccw(c3902.29,1678.13) J3.6@3892.27,1653.13 ; 3875.99,1698.03 cw(c3902.29,1703.87) J12.6@3892.27,1728.87 ; 3876.18,1687.98 cw(c3917.54,1694.87) J12.6@3895.34,1730.44 ; J3.6@3877.73,1653.13 ccw(c3867.71,1678.13) 3894.01,1683.97 ; J12.6@3877.73,1728.87 cw(c3867.71,1703.87) 3894.01,1698.03 ; 3880.42,1698.78 cw(c3930.65,1718.86) J12.6@3884.6,1747.25 ; 3882.09,1670.6 ccw(c3911.87,1677.21) J3.6@3895.49,1651.47 ; 3882.09,1711.4 cw(c3911.87,1704.79) J12.6@3895.49,1730.53 ; J12.6@3885,1747 J3.6@3885,1635 ; J3.6@3885.18,1634.56 ccw(c3876.59,1655.98) J3.6@3899.11,1660.98 ; J12.6@3885.18,1747.44 cw(c3876.59,1726.02) J12.6@3899.11,1721.02 ; J12.6@3885.25,1747.4 cw(c3869.62,1722.37) J12.6@3898.73,1717.53 ; J12.6@3885.32,1747.35 cw(c3854.58,1713.34) 3900.36,1715.65 ; J12.6@3885.4,1747.25 cw(c3839.35,1718.86) 3889.58,1698.78 ; 3890.69,1673.07 cw(c3854.38,1658.56) 3885.37,1634.71 ccw(c3837.02,1678.36) 3902.08,1681.65 ; 3892.34,1705.66 ccw(c3947.96,1683.43) J3.6@3900.48,1646.91 ; 3893.02,1688.44 cw(c3955.28,1702.27) J12.6@3901.47,1736.51 ; 3893.02,1693.56 ccw(c3955.28,1679.73) J3.6@3901.47,1645.49 ; J3.6@3895.16,1661.88 cw(c3972.76,1692.9) J12.6@3901.62,1736.75 ; J3.6@3903.81,1640.26 J12.6@3870.09,1724.61 ; J3.6@3904.5,1633.88 J12.6@3899.91,1724.61 ; J3.7@3965.5,1633.88 J12.7@3970.09,1724.61 ; J3.7@3965.59,1637.13 3985,1724.53 J3.7@4004.41,1637.13 ; J12.7@3965.59,1744.87 3985,1657.47 J12.7@4004.41,1744.87 ; J3.7@3966.19,1640.26 J12.7@3999.91,1724.61 ; 3967.2,1667.43 cw(c4061.21,1662.68) J12.7@3998.09,1732.51 ; 3967.92,1681.65 ccw(c4032.98,1678.36) 3984.65,1634.68 cw(c4015.62,1658.56) 3979.31,1673.07 ; J12.7@3968.38,1736.75 cw(c3897.24,1692.9) J3.7@3974.84,1661.88 ; J3.7@3968.53,1645.49 ccw(c3914.72,1679.73) 3976.98,1693.56 ; J12.7@3968.53,1736.51 cw(c3914.72,1702.27) 3976.98,1688.44 ; J3.7@3969.11,1646.35 ccw(c3930.76,1673.77) 3977.26,1681.5 ccw(c4023.77,1689.24) J3.7@3996.35,1650.89 ; J3.7@3969.52,1646.91 ccw(c3922.04,1683.43) 3977.66,1705.66 ; 3969.64,1715.65 cw(c4015.42,1713.34) J12.7@3984.68,1747.35 ; J12.7@3970.35,1729.87 ccw(c4083.64,1724.15) J3.7@3999.49,1648.09 ; J3.7@3970.51,1648.09 ccw(c3886.36,1724.15) J12.7@3999.65,1729.87 ; J3.7@3970.89,1660.98 ccw(c3993.41,1655.98) J3.7@3984.82,1634.56 ; J12.7@3970.89,1721.02 cw(c3993.41,1726.02) J12.7@3984.82,1747.44 ; J3.7@3971.19,1648.81 ccw(c3937.86,1682.14) 3985,1682.14 ccw(c4032.14,1682.14) J3.7@3998.81,1648.81 ; J12.7@3971.19,1733.19 cw(c3937.86,1699.86) 3985,1699.86 cw(c4032.14,1699.86) J12.7@3998.81,1733.19 ; J12.7@3971.27,1717.53 cw(c4000.38,1722.37) J12.7@3984.75,1747.4 ; J12.7@3971.91,1732.51 cw(c3908.79,1662.68) 4002.8,1667.43 ; J3.7@3973.65,1650.89 ccw(c3946.23,1689.24) 3992.74,1681.5 ccw(c4039.24,1673.77) J3.7@4000.89,1646.35 ; J3.7@3974.51,1651.47 ccw(c3958.13,1677.21) 3987.91,1670.6 ; J12.7@3974.51,1730.53 cw(c3958.13,1704.79) 3987.91,1711.4 ; J12.7@3974.66,1730.44 cw(c3952.46,1694.87) 3993.82,1687.98 ; 3975.99,1683.97 ccw(c4002.29,1678.13) J3.7@3992.27,1653.13 ; 3975.99,1698.03 cw(c4002.29,1703.87) J12.7@3992.27,1728.87 ; 3976.18,1687.98 cw(c4017.54,1694.87) J12.7@3995.34,1730.44 ; J3.7@3977.73,1653.13 ccw(c3967.71,1678.13) 3994.01,1683.97 ; J12.7@3977.73,1728.87 cw(c3967.71,1703.87) 3994.01,1698.03 ; 3980.42,1698.78 cw(c4030.65,1718.86) J12.7@3984.6,1747.25 ; 3982.09,1670.6 ccw(c4011.87,1677.21) J3.7@3995.49,1651.47 ; 3982.09,1711.4 cw(c4011.87,1704.79) J12.7@3995.49,1730.53 ; J12.7@3985,1747 J3.7@3985,1635 ; J3.7@3985.18,1634.56 ccw(c3976.59,1655.98) J3.7@3999.11,1660.98 ; J12.7@3985.18,1747.44 cw(c3976.59,1726.02) J12.7@3999.11,1721.02 ; J12.7@3985.25,1747.4 cw(c3969.62,1722.37) J12.7@3998.73,1717.53 ; J12.7@3985.32,1747.35 cw(c3954.58,1713.34) 4000.36,1715.65 ; J12.7@3985.4,1747.25 cw(c3939.35,1718.86) 3989.58,1698.78 ; 3990.69,1673.07 cw(c3954.38,1658.56) 3985.37,1634.71 ccw(c3937.02,1678.36) 4002.08,1681.65 ; 3992.34,1705.66 ccw(c4047.96,1683.43) J3.7@4000.48,1646.91 ; 3993.02,1688.44 cw(c4055.28,1702.27) J12.7@4001.47,1736.51 ; 3993.02,1693.56 ccw(c4055.28,1679.73) J3.7@4001.47,1645.49 ; J3.7@3995.16,1661.88 cw(c4072.76,1692.9) J12.7@4001.62,1736.75 ; J3.7@4003.81,1640.26 J12.7@3970.09,1724.61 ; J3.7@4004.5,1633.88 J12.7@3999.91,1724.61 ; v2(2817,3001) 2832.28,2986.72 ; v2(2817,3001) 2832.28,2986.72 ; v2(2817,3001) 2832.28,2986.72 ; v2(2817,3001) 2852,2967 ; 2852,2967 U1.4@2896,2993 2896,2967 2852,2967 ; R5.2@3275.6,2887 R4.2@3275.6,2935.4 ; R4.2@3275.6,2935.4 R3.2@3275.6,2991.79 ; R4.2@3275.6,2935.4 3287.41,2913.16 R3.2@3275.6,2991.79 ; R4.2@3275.6,2935.4 3287.41,2890.81 3287.41,3104.59 R2.2@3275.6,3048.19 ; R3.2@3275.6,2991.79 R2.2@3275.6,3048.19 ; R3.2@3275.6,2991.79 3287.41,2969.19 R2.2@3275.6,3048.19 ; R2.2@3275.6,3048.19 R1.2@3275.6,3104.59 3287.41,3025.41 R2.2@3275.6,3048.19 ; J12.6@3870.09,1724.61 J3.6@3885,1635 ; J3.6@3885,1635 J12.6@3899.91,1724.61 ; J12.7@3970.09,1724.61 J3.7@3985,1635 ; J3.7@3985,1635 J12.7@3999.91,1724.61 ; 2805.03,3014.59 ccw(c2823.5,3025.25) 2817.98,3004.65 cw(c2823.5,3025.25) 2805.03,3014.59
  Top Layer w30: C1.2@2765,3055.15 C5.1@2765,3169.56 ; 0.1@2778,1908 1.1@2878,1908 2.1@2978,1908 3.1@3078,1908 15.1@4509,1908 ; 0.1@2788.27,1897.73 cw(c2813.07,1872.93) 2813.07,1908 cw(c2813.07,1943.07) 0.1@2788.27,1918.27 ; 1.1@2867.73,1897.73 ccw(c2842.93,1872.93) 2842.93,1908 ccw(c2842.93,1943.07) 1.1@2867.73,1918.27 ; 1.1@2888.27,1897.73 cw(c2913.07,1872.93) 2913.07,1908 cw(c2913.07,1943.07) 1.1@2888.27,1918.27 ; 2.1@2967.73,1897.73 ccw(c2942.93,1872.93) 2942.93,1908 ccw(c2942.93,1943.07) 2.1@2967.73,1918.27 ; 2.1@2988.27,1897.73 cw(c3013.07,1872.93) 3013.07,1908 cw(c3013.07,1943.07) 2.1@2988.27,1918.27 ; 3.1@3067.73,1897.73 ccw(c3042.93,1872.93) 3042.93,1908 ccw(c3042.93,1943.07) 3.1@3067.73,1918.27 ; 3.1@3088.27,1897.73 cw(c3113.07,1872.93) 3113.07,1908 cw(c3113.07,1943.07) 3.1@3088.27,1918.27 ; 4.1@3205.73,1897.73 ccw(c3180.93,1872.93) 3180.93,1908 ccw(c3180.93,1943.07) 4.1@3205.73,1918.27 ; 4.1@3226.27,1897.73 cw(c3251.07,1872.93) 3251.07,1908 cw(c3251.07,1943.07) 4.1@3226.27,1918.27 ; 5.1@3305.73,1897.73 ccw(c3280.93,1872.93) 3280.93,1908 ccw(c3280.93,1943.07) 5.1@3305.73,1918.27 ; J10.7@3314.73,3428.27 ccw(c3289.93,3453.07) 3325,3453.07 ccw(c3360.07,3453.07) J10.7@3335.27,3428.27 ; J1.7@3314.73,3524.73 cw(c3289.93,3499.93) 3325,3499.93 cw(c3360.07,3499.93) J1.7@3335.27,3524.73 ; J10.7@3325,3418 J1.7@3325,3535 ; 5.1@3326.27,1897.73 cw(c3351.07,1872.93) 3351.07,1908 cw(c3351.07,1943.07) 5.1@3326.27,1918.27 ; 6.1@3405.73,1897.73 ccw(c3380.93,1872.93) 3380.93,1908 ccw(c3380.93,1943.07) 6.1@3405.73,1918.27 ; 6.1@3426.27,1897.73 cw(c3451.07,1872.93) 3451.07,1908 cw(c3451.07,1943.07) 6.1@3426.27,1918.27 ; 7.1@3505.73,1897.73 ccw(c3480.93,1872.93) 3480.93,1908 ccw(c3480.93,1943.07) 7.1@3505.73,1918.27 ; 7.1@3526.27,1897.73 cw(c3551.07,1872.93) 3551.07,1908 cw(c3551.07,1943.07) 7.1@3526.27,1918.27 ; 8.1@3761.73,1897.73 ccw(c3736.93,1872.93) 3736.93,1908 ccw(c3736.93,1943.07) 8.1@3761.73,1918.27 ; 8.1@3782.27,1897.73 cw(c3807.07,1872.93) 3807.07,1908 cw(c3807.07,1943.07) 8.1@3782.27,1918.27 ; 9.1@3861.73,1897.73 ccw(c3836.93,1872.93) 3836.93,1908 ccw(c3836.93,1943.07) 9.1@3861.73,1918.27 ; 9.1@3882.27,1897.73 cw(c3907.07,1872.93) 3907.07,1908 cw(c3907.07,1943.07) 9.1@3882.27,1918.27 ; 10.1@3961.73,1897.73 ccw(c3936.93,1872.93) 3936.93,1908 ccw(c3936.93,1943.07) 10.1@3961.73,1918.27 ; 10.1@3982.27,1897.73 cw(c4007.07,1872.93) 4007.07,1908 cw(c4007.07,1943.07) 10.1@3982.27,1918.27 ; 11.1@4061.73,1897.73 ccw(c4036.93,1872.93) 4036.93,1908 ccw(c4036.93,1943.07) 11.1@4061.73,1918.27 ; 11.1@4082.27,1897.73 cw(c4107.07,1872.93) 4107.07,1908 cw(c4107.07,1943.07) 11.1@4082.27,1918.27 ; 12.1@4198.73,1897.73 ccw(c4173.93,1872.93) 4173.93,1908 ccw(c4173.93,1943.07) 12.1@4198.73,1918.27 ; 12.1@4219.27,1897.73 cw(c4244.07,1872.93) 4244.07,1908 cw(c4244.07,1943.07) 12.1@4219.27,1918.27 ; U3.4@4240,2303.43 v2(4240,2270) U3.4@4240,2335.91 4240,2397 ; U3.4@4240,2368.39 4240,2397 ; U3.17@4240,2667.61 4240,2631 ; U3.17@4240,2700.09 4240,2631 ; U3.5@4290,2335.91 4290,2407 ; U3.5@4290,2349.18 cw(c4380.64,2349.18) v2@4316.55,2413.27 ; U3.5@4290,2360.56 cw(c4355.64,2360.56) v2@4316.69,2413.39 ; U3.5@4290,2368.39 4290,2407 ; U3.16@4290,2667.61 4290,2620 ; U3.16@4290,2700.09 4290,2620 ; 13.1@4298.73,1897.73 ccw(c4273.93,1872.93) 4273.93,1908 ccw(c4273.93,1943.07) 13.1@4298.73,1918.27 ; v2@4318.27,2413.27 cw(c4265.82,2360.82) U3.6@4340,2360.82 ; v2@4318.25,2413.3 cw(c4270.83,2362.94) U3.6@4340,2362.94 ; 13.1@4319.27,1897.73 cw(c4344.07,1872.93) 4344.07,1908 cw(c4344.07,1943.07) 13.1@4319.27,1918.27 ; U3.6@4340,2335.91 4340,2409 ; U3.6@4340,2368.39 4340,2409 ; U3.15@4340,2667.61 4340,2623 U3.15@4340,2700.09 ; U3.7@4390,2335.91 4390,2403 ; U3.7@4390,2368.39 4390,2403 ; U3.14@4390,2667.61 4390,2627 ; U3.14@4390,2700.09 4390,2627 ; 14.1@4398.73,1897.73 ccw(c4373.93,1872.93) 4373.93,1908 ccw(c4373.93,1943.07) 14.1@4398.73,1918.27 ; 14.1@4419.27,1897.73 cw(c4444.07,1872.93) 4444.07,1908 cw(c4444.07,1943.07) 14.1@4419.27,1918.27 ; 15.1@4498.73,1897.73 ccw(c4473.93,1872.93) 4473.93,1908 ccw(c4473.93,1943.07) 15.1@4498.73,1918.27 ; 4240,2397 4252,2409 ; 4240,2631 4255,2616 4294,2616 ; 4252,2409 v2(4317.41,2412.41) ; 4252,2409 4340,2409 ; 4290,2407 v2(4317.41,2412.41) ; 4290,2407 v2(4317.41,2412.41) ; 4290,2620 4294,2616 ; 4294,2616 4379,2616 4390,2627 ; v2(4317.41,2412.41) 4340,2409 ; v2(4317.41,2412.41) 4340,2409 ; v2(4317.41,2412.41) 4340,2409 ; v2(4317.41,2412.41) 4340,2409 ; v2(4317.41,2412.41) 4384,2409 ; 4340,2409 4384,2409 ; 4384,2409 4390,2403 ; R26.1@2914.92,2606.41 R28.1@2979.84,2606.41 R26.1@2914.92,2606.41 ; C6.1@3983,3105.18 C6.1@3983.59,3104.59 v2(3983,3152) C6.1@3983,3105.18 ; 4290,2384.47 cw(c4319.22,2384.47) 4317.33,2413.63 ccw(c4319.22,2384.47) 4290,2384.47 ; v2@4317.49,2413.63 cw(c4315.88,2389.56) 4340,2389.56 ccw(c4315.88,2389.56) v2@4317.49,2413.63
  Bottom Layer w30: J5.4@2475.64,2009.99 2588.07,1926.38 J5.4@2504.46,2038.81 ; J5.4@2486.03,2005.23 cw(c2468.73,1887.59) 2564.15,1958.55 ; J5.4@2489,2005.02 cw(c2489,1955.69) 2523.88,1990.57 cw(c2558.76,2025.45) J5.4@2509.43,2025.45 ; J5.4@2489,2025.45 2606.45,1908 0.1@2778,1908 ; J5.4@2509.22,2028.42 ccw(c2626.86,2045.72) 2555.9,1950.3 ; 0.1@2767.73,1897.73 ccw(c2742.93,1872.93) 2742.93,1908 ccw(c2742.93,1943.07) 0.1@2767.73,1918.27
  other v1: 2452.59,1872.59 2485.26,1872.59 2517.92,1872.59 2550.59,1872.59 4585.41,2030.59 4585.41,2063.26 4585.41,2095.92 4585.41,2128.59 3403.41,2298.41 3436.08,2298.41 3468.74,2298.41 3501.41,2298.41 3526.41,2414.59 3526.41,2447.26 3526.41,2479.92 3526.41,2512.59 3308.59,2606.41 3308.59,2639.08 3308.59,2671.74 3308.59,2704.41 2767.59,2739.41 2767.59,2772.08 4760.67,2796 4793.33,2796 4826,2796 4858.67,2796 2767.59,2804.74 2419.59,2812.59 2452.26,2812.59 2484.92,2812.59 2517.59,2812.59 2767.59,2837.41 4136.41,3088.59 3711.67,3100 3744.33,3100 3777,3100 4136.41,3121.26 4261.59,3149.59 4294.26,3149.59 4326.92,3149.59 4359.59,3149.59 4136.41,3153.92 3601.59,3263.59 3634.26,3263.59 3666.92,3263.59 3699.59,3263.59 4279.59,3313.59 4312.26,3313.59 4344.92,3313.59 4377.59,3313.59
  other v2: 3779,2554 3175,2567 3206.41,2993.41
GPIO0: J2.3 J11.3 | length 1097.1
  Top Layer w10: J11.3@4561,3423.05 4585,3477.53 ; J2.3@4561,3529.95 4585,3475.47 ; J11.3@4567.66,3435.34 ccw(c4525.79,3477.21) 4585,3477.21 ccw(c4644.21,3477.21) J11.3@4602.34,3435.34 ; J11.3@4570.58,3419.77 4585,3477.53 ; J2.3@4570.58,3533.23 4585,3475.47 ; J11.3@4574.73,3428.27 ccw(c4549.93,3453.07) 4585,3453.07 ccw(c4620.07,3453.07) J11.3@4595.27,3428.27 ; J11.3@4585,3418 J2.3@4585,3535 4585,3475.47 ; J11.3@4599.42,3419.77 4585,3477.53 ; J2.3@4599.42,3533.23 4585,3475.47 ; J11.3@4609,3423.05 4585,3477.53 ; J2.3@4609,3529.95 4585,3475.47 ; 4585,3475.79 cw(c4644.21,3475.79) 4602.34,3517.66 ccw(c4644.21,3475.79) 4585,3475.79 ; 4585,3475.79 ccw(c4525.79,3475.79) 4567.66,3517.66 cw(c4525.79,3475.79) 4585,3475.79 ; 4585,3499.93 cw(c4620.07,3499.93) 4595.27,3524.73 ccw(c4620.07,3499.93) 4585,3499.93 ; 4585,3499.93 ccw(c4549.93,3499.93) 4574.73,3524.73 cw(c4549.93,3499.93) 4585,3499.93
GPIO2/PWMA: J1.2 J10.2 R31.1 | length 1239.7
  Top Layer w10: J10.2@3807.66,3435.34 ccw(c3765.79,3477.21) 3825,3477.21 ccw(c3884.21,3477.21) J10.2@3842.34,3435.34 ; J1.2@3807.66,3517.66 cw(c3765.79,3475.79) 3825,3475.79 cw(c3884.21,3475.79) J1.2@3842.34,3517.66 ; J10.2@3814.73,3428.27 ccw(c3789.93,3453.07) 3825,3453.07 ccw(c3860.07,3453.07) J10.2@3835.27,3428.27 ; J1.2@3814.73,3524.73 cw(c3789.93,3499.93) 3825,3499.93 cw(c3860.07,3499.93) J1.2@3835.27,3524.73 ; J1.2@3825,3535 J10.2@3825,3418 3825,3338 3869,3294 4004,3294 4027,3271 4027,3031 4092,2966 4185,2966 4201,2950 R31.1@4201,2921.59 ; R31.1@4193.4,2929.19 ccw(c4175.05,2947.54) 4201,2947.54 ccw(c4226.95,2947.54) R31.1@4208.6,2929.19
GPIO3: J2.4 J11.4 | length 1097.1
  Top Layer w10: J11.4@4461,3423.05 4485,3477.53 ; J2.4@4461,3529.95 4485,3475.47 ; J11.4@4467.66,3435.34 ccw(c4425.79,3477.21) 4485,3477.21 ccw(c4544.21,3477.21) J11.4@4502.34,3435.34 ; J11.4@4470.58,3419.77 4485,3477.53 ; J2.4@4470.58,3533.23 4485,3475.47 ; J11.4@4474.73,3428.27 ccw(c4449.93,3453.07) 4485,3453.07 ccw(c4520.07,3453.07) J11.4@4495.27,3428.27 ; J11.4@4485,3418 J2.4@4485,3535 4485,3475.47 ; J11.4@4499.42,3419.77 4485,3477.53 ; J2.4@4499.42,3533.23 4485,3475.47 ; J11.4@4509,3423.05 4485,3477.53 ; J2.4@4509,3529.95 4485,3475.47 ; 4485,3475.79 cw(c4544.21,3475.79) 4502.34,3517.66 ccw(c4544.21,3475.79) 4485,3475.79 ; 4485,3475.79 ccw(c4425.79,3475.79) 4467.66,3517.66 cw(c4425.79,3475.79) 4485,3475.79 ; 4485,3499.93 cw(c4520.07,3499.93) 4495.27,3524.73 ccw(c4520.07,3499.93) 4485,3499.93 ; 4485,3499.93 ccw(c4449.93,3499.93) 4474.73,3524.73 cw(c4449.93,3499.93) 4485,3499.93
GPIO4: J2.5 J11.5 | length 1097.1
  Top Layer w10: J11.5@4361,3423.05 4385,3477.53 ; J2.5@4361,3529.95 4385,3475.47 ; J11.5@4367.66,3435.34 ccw(c4325.79,3477.21) 4385,3477.21 ccw(c4444.21,3477.21) J11.5@4402.34,3435.34 ; J11.5@4370.58,3419.77 4385,3477.53 ; J2.5@4370.58,3533.23 4385,3475.47 ; J11.5@4374.73,3428.27 ccw(c4349.93,3453.07) 4385,3453.07 ccw(c4420.07,3453.07) J11.5@4395.27,3428.27 ; J11.5@4385,3418 J2.5@4385,3535 4385,3475.47 ; J11.5@4399.42,3419.77 4385,3477.53 ; J2.5@4399.42,3533.23 4385,3475.47 ; J11.5@4409,3423.05 4385,3477.53 ; J2.5@4409,3529.95 4385,3475.47 ; 4385,3475.79 cw(c4444.21,3475.79) 4402.34,3517.66 ccw(c4444.21,3475.79) 4385,3475.79 ; 4385,3475.79 ccw(c4325.79,3475.79) 4367.66,3517.66 cw(c4325.79,3475.79) 4385,3475.79 ; 4385,3499.93 cw(c4420.07,3499.93) 4395.27,3524.73 ccw(c4420.07,3499.93) 4385,3499.93 ; 4385,3499.93 ccw(c4349.93,3499.93) 4374.73,3524.73 cw(c4349.93,3499.93) 4385,3499.93
GPIO4/SDA: J1.9 J10.9 R24.1 U2.27 | length 3456.1
  Top Layer w10: J10.9@3101,3423.05 3125,3477.53 ; J1.9@3101,3529.95 3125,3475.47 ; J10.9@3107.66,3435.34 ccw(c3065.79,3477.21) 3125,3477.21 ccw(c3184.21,3477.21) J10.9@3142.34,3435.34 ; J10.9@3110.58,3419.77 3125,3477.53 ; J1.9@3110.58,3533.23 3125,3475.47 ; J10.9@3110.88,3397.95 3175.74,3367.26 ; J10.9@3114.73,3428.27 ccw(c3089.93,3453.07) 3125,3453.07 ccw(c3160.07,3453.07) J10.9@3135.27,3428.27 ; J10.9@3115.82,3406.74 3175.74,3367.26 ; J10.9@3119.56,3417.39 ccw(c3164.2,3422.41) 3144.99,3381.81 ; J10.9@3123.37,3403.56 cw(c3115.86,3336.86) 3176.54,3365.57 ; J10.9@3124.34,3403.49 cw(c3121.8,3347.79) 3168.36,3378.47 ; J10.9@3124.49,3413.5 cw(c3118.22,3357.83) 3168.87,3381.79 ; J10.9@3124.79,3413.48 cw(c3122.9,3372.02) 3157.56,3394.85 ; J10.9@3125,3393.47 cw(c3125,3334.26) 3166.87,3376.13 cw(c3208.74,3418) J10.9@3149.53,3418 ; J10.9@3125,3403.47 cw(c3125,3368.4) 3149.8,3393.2 cw(c3174.6,3418) J10.9@3139.53,3418 ; J10.9@3125.61,3423.44 cw(c3120.59,3378.8) 3161.19,3398.01 ; J10.9@3129.52,3418.21 ccw(c3170.98,3420.1) 3148.15,3385.44 ; J10.9@3129.5,3418.51 ccw(c3185.17,3424.78) 3161.21,3374.13 ; J10.9@3136.26,3427.18 3175.74,3367.26 ; J10.9@3139.42,3419.77 3125,3477.53 ; J1.9@3139.42,3533.23 3125,3475.47 ; J10.9@3139.44,3419.63 ccw(c3206.14,3427.14) 3177.43,3366.46 ; J10.9@3139.51,3418.66 ccw(c3195.21,3421.2) 3164.53,3374.64 ; J10.9@3145.05,3432.12 3175.74,3367.26 ; J10.9@3149,3423.05 3125,3477.53 ; J1.9@3149,3529.95 3125,3475.47 ; U2.27@3766.27,2965.16 3747.29,2965.16 ; U2.27@3783,2965.16 3747.29,2965.16 ; U2.27@3783,2965.16 3836.16,2965.16 ; U2.27@3799.73,2965.16 3836.16,2965.16 ; 3895.05,3045.3 ccw(c3898.05,3057.82) R24.1@3910.24,3053.66 ; 3895.05,3055.08 cw(c3898.05,3042.56) R24.1@3910.24,3046.72 ; R24.1@3905.72,3042.74 ccw(c3908.49,3054.26) R24.1@3919.7,3050.43 ; R24.1@3905.72,3057.65 cw(c3908.49,3046.12) R24.1@3919.7,3049.95 ; R24.1@3919.15,3039.52 3874.66,3050.19 ; R24.1@3919.15,3060.87 3874.66,3050.19 ; 3125,3475.47 J1.9@3125,3535 J10.9@3125,3418 3183,3360 3352.46,3360 3747.29,2965.16 ; 3125,3475.79 cw(c3184.21,3475.79) 3142.34,3517.66 ccw(c3184.21,3475.79) 3125,3475.79 ; 3125,3475.79 ccw(c3065.79,3475.79) 3107.66,3517.66 cw(c3065.79,3475.79) 3125,3475.79 ; 3125,3499.93 cw(c3160.07,3499.93) 3135.27,3524.73 ccw(c3160.07,3499.93) 3125,3499.93 ; 3125,3499.93 ccw(c3089.93,3499.93) 3114.73,3524.73 cw(c3089.93,3499.93) 3125,3499.93 ; 3836.16,2965.16 3853,2982 3853,3039 3864.19,3050.19 R24.1@3920.41,3050.19 3874.66,3050.19 ; 3894.46,3050.19 cw(c3894.46,3024.25) 3912.81,3042.59 ccw(c3894.46,3024.25) 3894.46,3050.19 ; 3894.46,3050.19 ccw(c3894.46,3076.14) 3912.81,3057.79 cw(c3894.46,3076.14) 3894.46,3050.19
GPIO5: J2.6 J11.6 | length 1097.1
  Top Layer w10: J11.6@4261,3423.05 4285,3477.53 ; J2.6@4261,3529.95 4285,3475.47 ; J11.6@4267.66,3435.34 ccw(c4225.79,3477.21) 4285,3477.21 ccw(c4344.21,3477.21) J11.6@4302.34,3435.34 ; J11.6@4270.58,3419.77 4285,3477.53 ; J2.6@4270.58,3533.23 4285,3475.47 ; J11.6@4274.73,3428.27 ccw(c4249.93,3453.07) 4285,3453.07 ccw(c4320.07,3453.07) J11.6@4295.27,3428.27 ; J11.6@4285,3418 J2.6@4285,3535 4285,3475.47 ; J11.6@4299.42,3419.77 4285,3477.53 ; J2.6@4299.42,3533.23 4285,3475.47 ; J11.6@4309,3423.05 4285,3477.53 ; J2.6@4309,3529.95 4285,3475.47 ; 4285,3475.79 cw(c4344.21,3475.79) 4302.34,3517.66 ccw(c4344.21,3475.79) 4285,3475.79 ; 4285,3475.79 ccw(c4225.79,3475.79) 4267.66,3517.66 cw(c4225.79,3475.79) 4285,3475.79 ; 4285,3499.93 cw(c4320.07,3499.93) 4295.27,3524.73 ccw(c4320.07,3499.93) 4285,3499.93 ; 4285,3499.93 ccw(c4249.93,3499.93) 4274.73,3524.73 cw(c4249.93,3499.93) 4285,3499.93
GPIO5/SCL: J1.10 J10.10 R23.1 U2.26 | length 1502.4
  Top Layer w10: J1.10@3025,3535 J10.10@3025,3418 3103,3340 3339,3340 3739.35,2939.65 ; U2.26@3766.27,2939.65 3739.35,2939.65 ; U2.26@3799.73,2939.65 3836.62,2939.65 ; R23.1@3918.83,2985.16 3883.8,2995.8 ; R23.1@3918.83,3006.43 3883.8,2995.8 ; 3739.35,2939.65 U2.26@3783,2939.65 3850.65,2939.65 3871,2960 3871,2983 3883.8,2995.8 ; 3883.8,2995.8 R23.1@3920.41,2995.8 3883.8,2995.8 ; 3894.46,2995.8 cw(c3894.46,2969.85) 3912.81,2988.2 ccw(c3894.46,2969.85) 3894.46,2995.8 ; 3894.46,2995.8 ccw(c3894.46,3021.74) 3912.81,3003.4 cw(c3894.46,3021.74) 3894.46,2995.8
GPIO12/PWMB: J2.7 J11.7 R33.2 | length 1837.6
  Top Layer w10: J11.7@4161,3423.05 4185,3477.53 ; J2.7@4161,3529.95 4185,3475.47 ; J11.7@4167.66,3435.34 ccw(c4125.79,3477.21) 4185,3477.21 ccw(c4244.21,3477.21) J11.7@4202.34,3435.34 ; J11.7@4170.58,3419.77 4185,3477.53 ; J2.7@4170.58,3533.23 4185,3475.47 ; J11.7@4174.73,3428.27 ccw(c4149.93,3453.07) 4185,3453.07 ccw(c4220.07,3453.07) J11.7@4195.27,3428.27 ; J11.7@4199.42,3419.77 4185,3477.53 ; J2.7@4199.42,3533.23 4185,3475.47 ; J11.7@4209,3423.05 4185,3477.53 ; J2.7@4209,3529.95 4185,3475.47 ; R33.2@4396.4,2929 ccw(c4378.05,2947.35) 4404,2947.35 ccw(c4429.95,2947.35) R33.2@4411.6,2929 ; R33.2@4404,2921.4 4404,3070 4390,3084 4198,3084 4185,3097 J11.7@4185,3418 J2.7@4185,3535 4185,3475.47 ; 4185,3475.79 cw(c4244.21,3475.79) 4202.34,3517.66 ccw(c4244.21,3475.79) 4185,3475.79 ; 4185,3475.79 ccw(c4125.79,3475.79) 4167.66,3517.66 cw(c4125.79,3475.79) 4185,3475.79 ; 4185,3499.93 cw(c4220.07,3499.93) 4195.27,3524.73 ccw(c4220.07,3499.93) 4185,3499.93 ; 4185,3499.93 ccw(c4149.93,3499.93) 4174.73,3524.73 cw(c4149.93,3499.93) 4185,3499.93
GPIO13/DIRB: J2.8 J11.8 U3.12 U4.3 | length 1360.2
  Top Layer w10: J2.8@4085,3535 J11.8@4085,3418 4085,3061 4099,3047 4343,3047 4358,3032 4358,2893 4327.59,2862.59 U4.3@4327.59,2857.52 4327.59,2812.41 ; U4.3@4327.59,2847.68 4327.59,2812.41 ; U4.3@4327.59,2867.36 4354.11,2889.11 ; U4.3@4327.59,2869.25 ccw(c4327.59,2885.33) 4338.96,2873.96 ; U3.12@4485.18,2737.38 ccw(c4473.56,2749.01) 4490,2749.01 ccw(c4506.44,2749.01) U3.12@4494.82,2737.38 ; U3.12@4490,2700.09 4490,2789 4475,2804 4336,2804 4327.59,2812.41
GPIO13/DIRB#: U3.19 U4.4 | length 1536.2
  Top Layer w10: U3.19@4133.28,2733.67 v2(4143.41,2774.41) ; U3.19@4135.18,2737.38 ccw(c4115.33,2757.24) 4143.41,2757.24 ; U3.19@4135.59,2737.76 ccw(c4124.95,2750.29) 4141.34,2748.96 ccw(c4157.72,2747.62) U3.19@4145.19,2736.98 ; v2@4135.89,2769.88 cw(c4117.72,2758.95) 4138.29,2753.84 cw(c4158.86,2748.73) v2@4147.94,2766.89 ; v2@4136.72,2768.73 cw(c4120.56,2755) 4141.69,2753.28 cw(c4162.81,2751.56) v2@4149.09,2767.72 ; v2@4137.2,2768.2 cw(c4122.21,2753.21) 4143.41,2753.21 cw(c4164.6,2753.21) v2@4149.62,2768.2 ; v2@4137.72,2767.72 cw(c4124,2751.57) 4145.13,2753.29 cw(c4166.25,2755) v2@4150.1,2768.72 ; U3.19@4140,2700.09 4143.41,2703.5 v2(4143.41,2774.41) ; U3.19@4140,2732.57 v2(4143.41,2774.41) ; v2@4140.32,2761.98 ccw(c4169.52,2754.71) U3.19@4145.45,2736.65 ; 4140.62,2745.16 cw(c4173.13,2745.74) v2@4149.73,2768.31 ; v2(4143.41,3016.41) 4187.2,3017 ; v2@4144,3017 4316,3017 4327.59,3005.41 U4.4@4327.59,2924.45 ; v2@4144.17,3025.16 4187.2,3017 ; v2@4144.41,3007.69 4187.2,3017 ; U3.19@4146.81,2732.57 v2(4143.41,2774.41) ; v2@4149.53,3022.7 ccw(c4164.32,3037.89) 4164.6,3016.7 ccw(c4164.89,2995.5) v2@4149.7,3010.29 ; v2@4149.62,3010.2 cw(c4166.03,2993.79) 4166.03,3017 ; v2@4149.62,3022.62 ccw(c4163.18,3036.18) 4163.18,3017 ; v2@4151.05,3020.74 ccw(c4165.09,3028.71) 4168.52,3012.93 ; v2@4151.65,3013.37 cw(c4163.1,3009.14) 4165.37,3021.14 ; U4.4@4327.59,2934.29 4327.59,2971.18
  Bottom Layer w10: v2@4134.67,2775.29 4143.41,2818.19 v2@4152.14,2775.29 ; v2@4134.67,3015.53 4143.41,2972.63 v2@4152.14,3015.53 ; v2@4137.2,2780.62 ccw(c4122.21,2795.61) 4143.41,2795.61 ccw(c4164.6,2795.61) v2@4149.62,2780.62 ; v2@4137.2,3010.2 cw(c4122.21,2995.21) 4143.41,2995.21 cw(c4164.6,2995.21) v2@4149.62,3010.2 ; 4139.31,2798.04 ccw(c4153.24,2795.2) v2@4147.16,2782.35 ; 4139.31,2992.78 cw(c4153.24,2995.62) v2@4147.16,3008.47 ; v2@4139.66,2782.35 ccw(c4133.57,2795.2) 4147.51,2798.04 ; v2@4139.66,3008.47 cw(c4133.57,2995.62) 4147.51,2992.78 ; v2(4143.41,2774.41) v2(4143.41,3016.41)
GPIO14: 
GPIO15: 